# EAGLE board ARKnew (EAGLE 9.4.2)
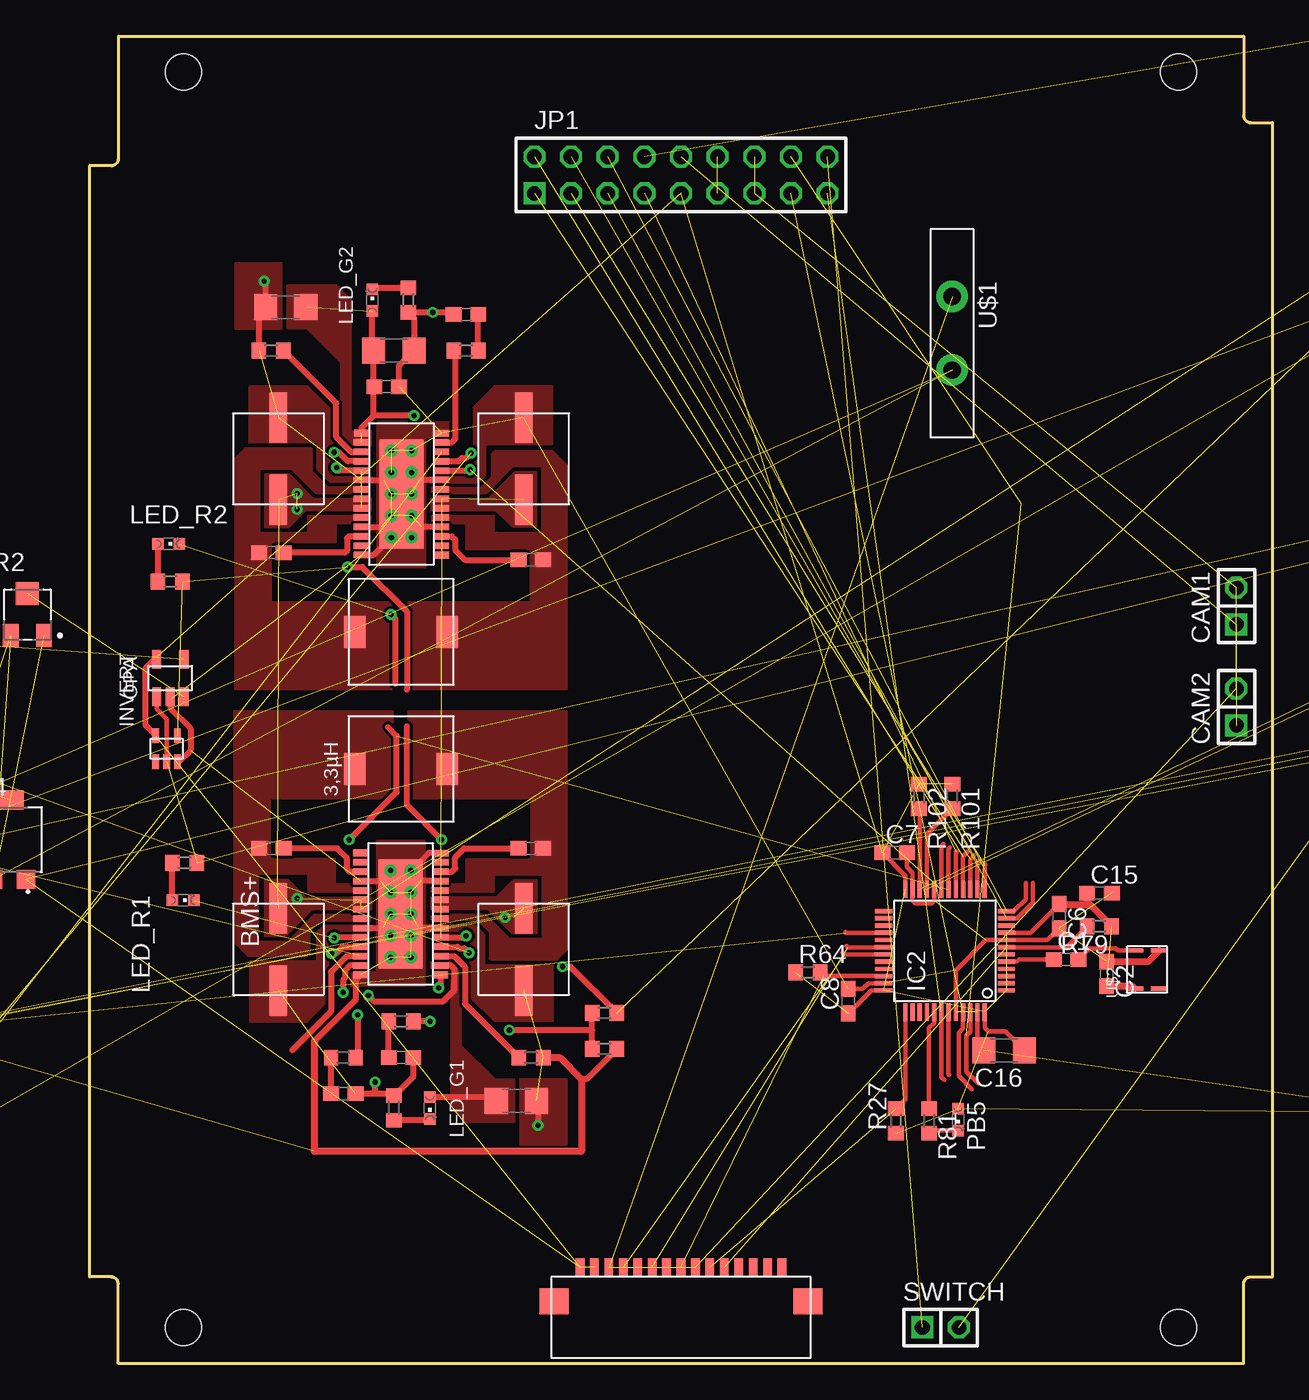
[diagram p0: board, top side]
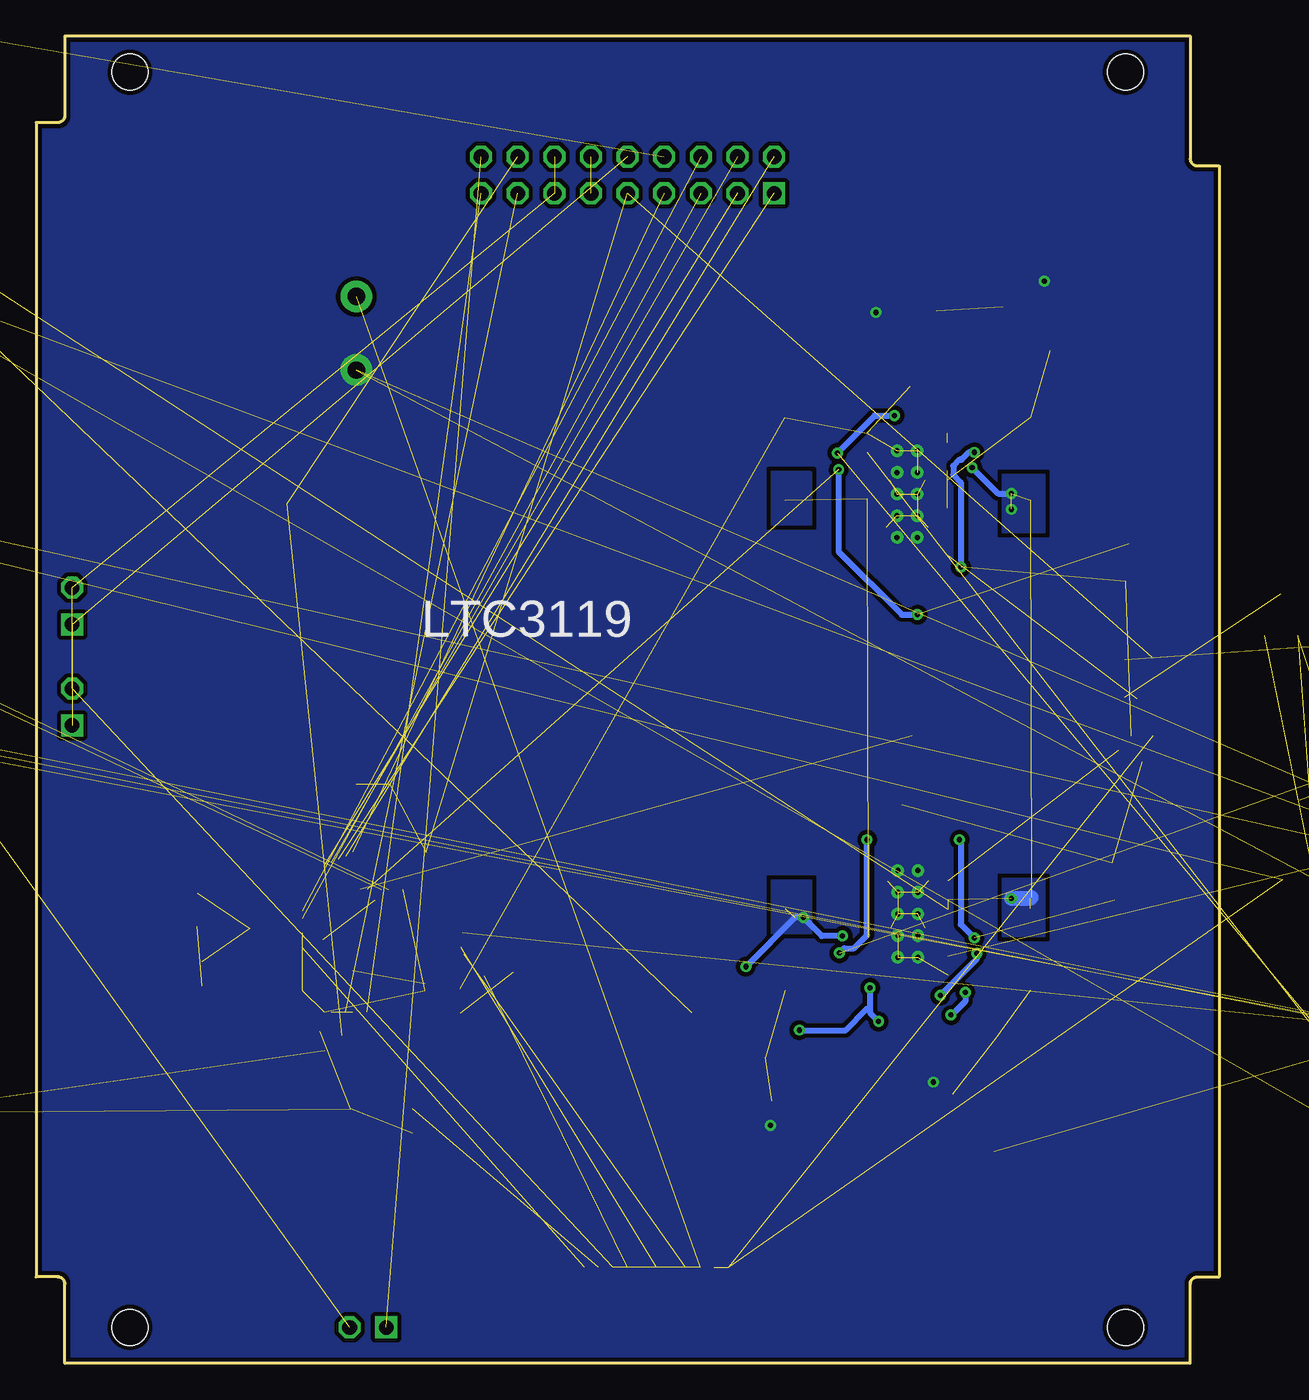
[diagram p1: board, bottom side, seen from below]

Size 82 x 92 mm. Coordinates in mm from the lower left corner, seen from the top.
Outline: 2,92 80,92 80,86.5 arc90 80.5,86 82,86 82,6 80.5,6 arc90 80,5.5 80,0 2,0 2,5.5 arc90 1.5,6 0,6 0,83 1.5,83 arc90 2,83.5 2,92
Copper layers (1*16): Top 0.035mm / dielectric 1.5mm / Bottom 0.035mm
Design rules "default *": minimum track width 0.25mm, minimum drill 0.35mm, track to track 0.2mm, track to pad 0.2mm, pad to pad 0.2mm, via to via 0.2mm, smd to smd 0.2mm, copper to edge 0.25mm, drill to drill 0.2mm, minimum pad ring 10mil, minimum via ring 8mil, stop-mask expansion 4mil, vias tented up to drill 0mil, thermal gap 10mil
Holes 2.5 mm at 6.5,2.5 75.5,2.5 75.5,89.5 6.5,89.5

## Footprints (pad centres in the part's own frame; a part is rotated, then mirrored left to right if it is on the bottom)
B82472G6 = smd 1.5 x 2.2: 1 -3.2,0; 2 3.2,0
MSOP10 = smd 0.3 x 1.275: 1 -1,-2.24; 2 -0.5,-2.24; 3 0,-2.24; 4 0.5,-2.24; 5 1,-2.24; 6 1,2.24; 7 0.5,2.24; 8 0,2.24; 9 -0.5,2.24; 10 -1,2.24
C0603 = smd 1.1 x 1: 1 -0.85,0; 2 0.85,0
C1206 = smd 1.6 x 1.8: 1 -1.4,0; 2 1.4,0
ECAP150-CMD = smd 1.2 x 3.5: P$1 0,2.85; P$2 0,-2.85
ECAP220-CMD = smd 1.2 x 3.5: P$1 0,2.85; P$2 0,-2.85
1X02 = drill 1.016 square: 1 -1.27,0 | drill 1.016 octagon: 2 1.27,0
LQFP48 = smd 0.3 x 1.2: 1 -2.75,-4.25; 2 -2.25,-4.25; 3 -1.75,-4.25; 4 -1.25,-4.25; 5 -0.75,-4.25; 6 -0.25,-4.25; 7 0.25,-4.25; 8 0.75,-4.25; 9 1.25,-4.25; 10 1.75,-4.25; 11 2.25,-4.25; 12 2.75,-4.25; 25 2.75,4.25; 26 2.25,4.25; 27 1.75,4.25; 28 1.25,4.25; 29 0.75,4.25; 30 0.25,4.25; 31 -0.25,4.25; 32 -0.75,4.25; 33 -1.25,4.25; 34 -1.75,4.25; 35 -2.25,4.25; 36 -2.75,4.25 | smd 1.2 x 0.3: 13 4.25,-2.75; 14 4.25,-2.25; 15 4.25,-1.75; 16 4.25,-1.25; 17 4.25,-0.75; 18 4.25,-0.25; 19 4.25,0.25; 20 4.25,0.75; 21 4.25,1.25; 22 4.25,1.75; 23 4.25,2.25; 24 4.25,2.75; 37 -4.25,2.75; 38 -4.25,2.25; 39 -4.25,1.75; 40 -4.25,1.25; 41 -4.25,0.75; 42 -4.25,0.25; 43 -4.25,-0.25; 44 -4.25,-0.75; 45 -4.25,-1.25; 46 -4.25,-1.75; 47 -4.25,-2.25; 48 -4.25,-2.75
SOT23-8 = smd 0.9 x 0.4: 1 -1.3,0.975; 2 -1.3,0.325; 3 -1.3,-0.325; 4 -1.3,-0.975; 5 1.3,-0.975; 6 1.3,-0.325; 7 1.3,0.325; 8 1.3,0.975
SC70 = smd 0.47 x 1: P$1 -0.75,-0.9; P$2 0,-0.9; P$3 0.75,-0.9; P$4 0.75,0.9; P$5 -0.75,0.9
2X09 = drill 1.016 square: 1 -10.16,-1.27 | drill 1.016 octagon: 2 -10.16,1.27; 3 -7.62,-1.27; 4 -7.62,1.27; 5 -5.08,-1.27; 6 -5.08,1.27; 7 -2.54,-1.27; 8 -2.54,1.27; 9 0,-1.27; 10 0,1.27; 11 2.54,-1.27; 12 2.54,1.27; 13 5.08,-1.27; 14 5.08,1.27; 15 7.62,-1.27; 16 7.62,1.27; 17 10.16,-1.27; 18 10.16,1.27
CHIPLED_0603 = smd 0.8 x 0.8: A 0,-0.75; C 0,0.75
SOT23-5 = smd 0.635 x 1.27: P$1 -0.95,-1.3; P$2 0,-1.3; P$3 0.95,-1.3; P$4 0.95,1.3; P$5 -0.95,1.3
R0603 = smd 1 x 1.1: 1 -0.85,0; 2 0.85,0
TRIM_3313J-1-205E = smd 1.1 x 1.6: 1 1.15,-1.45; 3 -1.15,-1.45 | smd 1.6 x 1.6: 2 0,1.45
TRIM_3314G-1-504E = smd 1.3 x 1.3: 1 1.15,-2.75; 3 -1.15,-2.75 | smd 2 x 1.3: 2 0,2.75
R2512 = smd 1.8 x 3.2: 1 -2.8,0; 2 2.8,0
MF-R400 = drill 1.2 pad 2.184: P$1 0,2.55; P$2 0,-2.55
Q24 = smd 0.3 x 1.2: P$1 -1.325,-0.85; P$2 1.325,-0.85; P$3 1.325,0.85; P$4 -1.325,0.85
68611 = smd 0.6 x 1.3: P$1 -7,0.65; P$2 -6,0.65; P$3 -5,0.65; P$4 -4,0.65; P$5 -3,0.65; P$6 -2,0.65; P$7 -1,0.65; P$8 0,0.65; P$9 1,0.65; P$10 2,0.65; P$11 3,0.65; P$12 4,0.65; P$13 5,0.65; P$14 6,0.65; P$15 7,0.65 | smd 2 x 1.8: P$16 8.8,-1.7; P$17 -8.8,-1.7
LTC3119+VIA = smd 0.45 x 1.05: 1 -4.225,-2.775; 2 -3.575,-2.775; 3 -2.925,-2.775; 4 -2.275,-2.775; 5 -1.625,-2.775; 6 -0.975,-2.775; 7 -0.325,-2.775; 8 0.325,-2.775; 9 0.975,-2.775; 10 1.625,-2.775; 11 2.275,-2.775; 12 2.925,-2.775; 13 3.575,-2.775; 14 4.225,-2.775; 15 4.225,2.775; 16 3.575,2.775; 17 2.925,2.775; 18 2.275,2.775; 19 1.625,2.775; 20 0.975,2.775; 21 0.325,2.775; 22 -0.325,2.775; 23 -0.975,2.775; 24 -1.625,2.775; 25 -2.275,2.775; 26 -2.925,2.775; 27 -3.575,2.775; 28 -4.225,2.775 | smd 7.56 x 3.05: 29 0,0 | drill 0.35 pad 0.813: P$1 -3,0.7; P$2 -1.5,0.7; P$3 0,0.7; P$4 1.5,0.7; P$5 3,0.7; P$6 3,-0.7; P$7 1.5,-0.7; P$8 0,-0.7; P$9 -1.5,-0.7; P$10 -3,-0.7

## Placement (x,y rotation side)
3,3µH  3,3µ  [B82472G6]  21.6,41.2 0 top
3,3µH1  3,3µH  [B82472G6]  21.6,50.7 180 top
AD5272#2  AD5272  [MSOP10]  -9.3,21.31 0 top  (outside the outline)
C1  1nF  [C0603]  67.7,28 0 top
C2  10nF  [C0603]  70.5,27 270 top
C5  100nF  [C0603]  90.9,17.4 0 top  (outside the outline)
C6  100nF  [C0603]  67.2,31 270 top
C7  100nF  [C0603]  55.8,35.4 0 top
C8  100nF  [C0603]  52.6,25.1 90 top
C9  0,1µ  [C0603]  115.8,92.3 0 top  (outside the outline)
C10  0,1µ  [C0603]  120.8,92.3 0 top  (outside the outline)
C15  100nF  [C0603]  70,32.6 0 top
C16  10µ  [C1206]  63.4,21.7 180 top
C29  1µ  [C0603]  -15.3,18.4 0 top  (outside the outline)
C40  0,1µ  [C0603]  30.6,35.7 180 top
C41  0,1µ  [C0603]  12.6,35.7 0 top
C44  680p  [C0603]  17.6,18.7 0 top
C45  4.7µ  [C1206]  29.6,18.2 0 top
C46  3,3n  [C0603]  21.6,21.2 0 top
C47  150µ  [ECAP150-CMD]  13.1,28.7 0 top
C48  220µ  [ECAP220-CMD]  30.1,28.7 0 top
C49  0,1µ  [C0603]  12.6,56.2 0 top
C50  0,1µ  [C0603]  30.6,55.7 180 top
C52  680p  [C0603]  26.1,72.7 180 top
C53  4.7µ  [C1206]  13.6,73.2 180 top
C54  150µ  [ECAP150-CMD]  30.1,62.7 180 top
C55  220µ  [ECAP220-CMD]  13.1,62.7 180 top
C56  0,1µ  [C0603]  20.6,67.7 0 top
C57  10µ  [C1206]  21.1,70.2 0 top
CAM1  [1X02]  79.5,52.5 90 top
CAM2  [1X02]  79.5,45.5 90 top
IC2  STM32F103C8T  [LQFP48]  59.3,28.6 90 top
INA219#1  INA219AID  [SOT23-8]  122.2,50.12 0 top  (outside the outline)
INVERT  INVERTER.  [SC70]  5.35,42.6 0 top
JP1  [2X09]  41,82.37 0 top
LED_G1  [CHIPLED_0603]  23.6,17.7 180 top
LED_G2  [CHIPLED_0603]  19.6,73.7 0 top
LED_R1  [CHIPLED_0603]  6.5,32.1 270 top
LED_R2  [CHIPLED_0603]  5.5,56.8 270 top
OPA  OPA333  [SOT23-5]  5.6,47.5 0 top
PB5  [CHIPLED_0603]  60.2,16.9 180 top
PWR  [CHIPLED_0603]  87.9,16.4 0 top  (outside the outline)
R1  91K  [R0603]  -9.5,15.4 0 top  (outside the outline)
R2  3313J-1-205E  [TRIM_3313J-1-205E]  -4.3,51.9 0 top  (outside the outline)
R3  14K3  [R0603]  -15.3,23.4 0 top  (outside the outline)
R4  3314G-1-504E  [TRIM_3314G-1-504E]  -5.55,36.3 0 top  (outside the outline)
R5  3314G-1-504E  [TRIM_3314G-1-504E]  -21.4,48 0 top  (outside the outline)
R6  3314G-1-504E  [TRIM_3314G-1-504E]  -22.5,35.5 0 top  (outside the outline)
R27  10k  [R0603]  55.9,16.8 90 top
R28  150k  [R0603]  12.6,70.2 0 top
R30  150k  [R0603]  26.1,70.2 0 top
R32  2k  [R0603]  6.6,34.7 180 top
R33  2k  [R0603]  22.1,73.7 90 top
R57  2k  [R0603]  5.6,54.2 180 top
R64  10k  [R0603]  49.8,27.1 0 top
R65  1M  [R0603]  35.7,24.3 0 top
R66  10k  [R0603]  21.6,23.7 0 top
R67  150k  [R0603]  35.7,21.8 180 top
R68  150k  [R0603]  30.6,21.2 180 top
R69  150k  [R0603]  17.6,21.2 180 top
R71  R01  [R2512]  117.8,99.3 0 top  (outside the outline)
R73  10R  [R0603]  125.8,92.3 0 top  (outside the outline)
R74  10R  [R0603]  115.8,87.3 0 top  (outside the outline)
R75  R01  [R2512]  125.8,99.3 0 top  (outside the outline)
R76  10R  [R0603]  120.8,87.3 0 top  (outside the outline)
R77  10R  [R0603]  125.8,87.3 0 top  (outside the outline)
R79  10k  [R0603]  70,30.3 180 top
R81  2k  [R0603]  58.2,16.8 270 top
R82  2k  [R0603]  91.9,6.7 0 top  (outside the outline)
R100  2k  [R0603]  21.1,17.7 270 top
R101  5k1  [R0603]  59.8,39.3 270 top
R102  5k1  [R0603]  57.5,39.3 270 top
SWITCH  [1X02]  59,2.5 0 top
U$1  MF-R400  [MF-R400]  59.8,71.4 180 top
U$2  Q24  [Q24]  73.3,27.3 90 top
U$12  FFC-CONNECT68611  [68611]  41,6 0 top
U$23  LTC31191  [LTC3119+VIA]  21.62,60.26 90 top
U$57  INA219AID  [SOT23-8]  122.2,64.78 0 top  (outside the outline)
U$59  LTC31191  [LTC3119+VIA]  21.57,31.16 270 top

## Library data of the parts
3,3µH 3,3µH1 AD5272#2 C47 C48 C54 C55 IC2 INA219#1 INVERT OPA R4-R6 U$1 U$2 U$12 U$23 U$57 U$59 = CanCubeSat
C1 C2 C5-C10 C15 C16 C29 C40 C41 C44-C46 C49 C50 C52 C53 C56 C57 = rcl; SPICEPREFIX: C
CAM1 CAM2 JP1 SWITCH = pinheadCS
LED_G1 LED_G2 LED_R1 LED_R2 PB5 PWR = led
R1 R3 R27 R28 R30 R32 R33 R57 R64-R69 R73 R74 R76 R77 R79 R81 R82 R100-R102 = resistor
R2 = CanCubeSat; AVAILABILITY: Good; DESCRIPTION: 100 kOhms 0.125W, 1/8W J Lead Surface Mount Trimmer Potentiometer Cermet 1 Turn Top Adjustment; MF: Bourns; MP: 3313J-1-104E; PACKAGE: 5025 Bourns; PRICE: None; PURCHASE-URL: https://pricing.snapeda.com/search/part/3313J-1-104E/?ref=eda
R71 R75 = rcl; SPICEPREFIX: R

## Nets
1.65: R4.2 R5.3
1W: IC2.17 JP1.7
3V3: C2.2 C5.1 C6.1 C7.1 C8.1 C15.1 C16.1 IC2.1 IC2.9 IC2.24 IC2.36 IC2.48 INA219#1.4 INVERT.P$5 JP1.9 OPA.P$5 PB5.A PWR.A R4.1 R27.1 R64.1 R79.1 R101.1 R102.1 U$2.P$4 U$12.P$1 U$12.P$2 U$57.4 U$57.7
5V: CAM1.1 CAM2.1 JP1.10
90: R65.1 R66.2 R67.2 U$59.15
302: OPA.P$4 R5.2
A: INVERT.P$2 OPA.P$1 R5.1 R32.1 U$59.18
AB-GND: JP1.11 JP1.12
BMS1: IC2.15 JP1.1
BMS2: IC2.16 JP1.2
BMS3: IC2.13 JP1.3
BMS4: IC2.14 JP1.4
BMS5: IC2.11 JP1.5
BMS6: IC2.12 JP1.6
BMS+: JP1.8 R75.2 R76.1
BUS+: R71.2 R73.1 SWITCH.2
BUSPLUS: JP1.18 SWITCH.1
DPD_RST: AD5272#2.7 IC2.28
GND: AD5272#2.6 AD5272#2.10 C2.1 C5.2 C6.2 C7.2 C8.2 C15.2 C16.2 C44.2 C45.2 C46.2 C47.P$2 C48.P$2 C52.2 C53.2 C54.P$2 C55.P$2 C56.2 C57.2 IC2.8 IC2.20 IC2.23 IC2.35 IC2.44 IC2.47 INA219#1.3 INA219#1.7 INA219#1.8 INVERT.P$3 OPA.P$2 R2.3 R3.2 R4.3 R6.3 R28.1 R33.1 R67.1 R68.1 R82.1 R100.1 U$1.P$1 U$2.P$2 U$23.4 U$23.9 U$23.14 U$23.20 U$23.25 U$23.28 U$23.29 U$23.P$1 U$23.P$2 U$23.P$3 U$23.P$4 U$23.P$5 U$23.P$6 U$23.P$7 U$23.P$8 U$23.P$9 U$23.P$10 U$57.3 U$57.8 U$59.4 U$59.9 U$59.14 U$59.20 U$59.25 U$59.28 U$59.29 U$59.P$1 U$59.P$2 U$59.P$3 U$59.P$4 U$59.P$5 U$59.P$6 U$59.P$7 U$59.P$8 U$59.P$9 U$59.P$10
GND-OUT: CAM1.2 CAM2.2 JP1.13 JP1.14 U$1.P$2 U$12.P$3 U$12.P$5 U$12.P$7 U$12.P$9
I2CINT: IC2.43
INA_BMS+: C47.P$1 C55.P$1 R6.1 R75.1 R77.1 U$23.19 U$23.22 U$23.23 U$59.6 U$59.7
INA_BUS+: C48.P$1 C54.P$1 R1.1 R2.1 R65.2 R71.1 R74.1 U$23.6 U$23.7 U$59.19 U$59.22 U$59.23
N$1: C1.1 IC2.5
N$3: AD5272#2.2 R1.2 U$23.12
N$4: C1.2 U$2.P$3
N$14: C9.2 INA219#1.2 R74.2
N$17: PB5.C R81.2
N$48: AD5272#2.3 AD5272#2.4 C29.2 R3.1
N$51: AD5272#2.5 C29.1
N$77: 3,3µH1.2 C49.1 U$23.21 U$23.24
N$78: 3,3µH1.1 C50.1 U$23.5 U$23.8
N$79: R28.2 U$23.17
N$80: C49.2 U$23.26
N$81: R30.1 U$23.13
N$82: C52.1 R30.2
N$84: C50.2 U$23.3
N$85: LED_R1.A R32.2
N$87: LED_R2.A R57.2
N$89: R6.2 U$59.12
N$91: LED_G1.C R100.2
N$92: LED_G2.C R33.2
N$129: C41.2 U$59.3
N$131: 3,3µH.2 C40.1 U$59.21 U$59.24
N$132: 3,3µH.1 C41.1 U$59.5 U$59.8
N$135: R69.1 U$59.13
N$136: C44.1 R69.2
N$139: C46.1 R66.1
N$142: R68.2 U$59.17
N$144: C40.2 U$59.26
N$147: C9.1 INA219#1.1 R73.2
N$150: C10.1 R76.2 U$57.1
N$151: C10.2 R77.2 U$57.2
N$159: PWR.C R82.2
N$161: IC2.41 R81.1
N$215: AD5272#2.1 C53.1 C56.1 C57.1 LED_G2.A U$23.11 U$23.15 U$23.16
N$234: C45.1 LED_G1.A U$59.11 U$59.16
NRST: IC2.7 R79.2 U$12.P$11
PGOOD1: IC2.18 LED_R1.C U$59.10
PGOOD2: IC2.19 LED_R2.C U$23.10
RUN: OPA.P$3 R2.2
RX-S: IC2.31 U$12.P$4
SCL: AD5272#2.9 IC2.21 INA219#1.5 R101.2 U$57.5
SCLTM: IC2.45 JP1.15
SDA: AD5272#2.8 IC2.22 INA219#1.6 R102.2 U$57.6
SDATM: IC2.46 JP1.16
SWC: IC2.37 R27.2 U$12.P$10
SWD: IC2.34 R64.2 U$12.P$8
TIME: IC2.42 JP1.17
TX-S: IC2.30 U$12.P$6
Y: INVERT.P$4 R57.1 U$23.18

## Tracks (layer width: path | path; a pad name or v marks a point on that pad's centre or on a via)
1.65  (1 unrouted)
1W  (1 unrouted)
  Top 0.3: IC2.17 60.05,35.44 60.11,35.49
3V3  (20 unrouted)
  Top 0.3: IC2.48 62.05,23.25 62.3,23 63.5,23 C16.1 | IC2.36 54.2,25.85 C8.1 | IC2.24 56.55,33.8 C7.1 | IC2.9 65.2,29.85 67.17,31.82 C6.1
  Top 0.4: OPA.P$5 4.65,48.95 3.9,48.2 3.9,44.2 INVERT.P$5
  Top 0.5: C2.2 72.28,26.15 U$2.P$4 | R79.1 69.38,31.77 | 69.38,31.77 69.15,32 C15.1 | 69.38,31.77 67.22,31.77 67.17,31.82
5V  (2 unrouted)
90  (via drill 0.35, 0.35 pad 0.7)
  Top 0.4: U$59.15 24.35,26.18 v24.2,26.03 | v23.6,23.7 R66.2 | R67.2 34.85,23.1 | 34.85,23.1 R65.1 | 34.85,23.1 v29.1,23.1
  Bottom 0.4: v24.2,26.03 24.2,24.4 | 24.2,24.4 24.2,24.3 v23.6,23.7 | 24.2,24.4 24.4,24.6 25.89,23.1 v29.1,23.1
302  (1 unrouted)
A  (via drill 0.35)  (3 unrouted)
  Top 0.3: INVERT.P$2 5.35,44.65 4.65,45.35 OPA.P$1
  Top 0.4: U$59.18 25.49,28.88 25.59,28.78 25.98,28.78 v26.32,28.45 | v24.4,36.3 22,38.7 22,44.15
  Bottom 0.4: v26.32,28.45 25.99,28.77 25.3,28.77 24.4,29.67 v24.4,36.3
AB-GND  (1 unrouted)
BMS1  (1 unrouted)
  Top 0.3: IC2.15 61.05,34.94 61.3,35.2
BMS2  (1 unrouted)
  Top 0.3: IC2.16 60.55,35.15 60.9,35.5
BMS3  (1 unrouted)
  Top 0.3: IC2.13 62.05,34.53 62.11,34.59
BMS4  (1 unrouted)
  Top 0.3: IC2.14 61.55,34.74 61.71,34.89
BMS5  (1 unrouted)
  Top 0.3: IC2.11 64.3,30.85 65.4,31.95 65.4,33.3
BMS6  (1 unrouted)
  Top 0.3: IC2.12 64.09,31.35 64.9,32.16 64.9,33.3
BMS+  (2 unrouted)
BUS+  (2 unrouted)
BUSPLUS  (1 unrouted)
DPD_RST  (1 unrouted)
  Top 0.3: IC2.28 52.45,29.85 52.4,29.9
GND  (via drill 0.35 pad 0.7)  (52 unrouted)
  Top 0.3: IC2.47 61.55,22.15 C16.2 | IC2.44 60.05,27.25 62.15,29.35 IC2.8 66.4,29.35 C6.2 | IC2.35 53.99,26.35 53.59,25.95 C8.2 | C7.2 56.65,34.41 57.05,34.01 IC2.23 57.05,32.1 57.26,31.9 58.34,31.9 58.55,32.1 IC2.20
  Top 0.4: U$59.14 18.44,26.58 18.44,25.21 15.6,22.37 | C45.2 31.1,18.1 v31.1,16.5 | C53.2 12.2,73.4 | 12.2,73.4 12.2,74.9 v12.1,75 | U$59.4 20.15,33.43 U$59.P$10 | U$59.25 23,33.43 U$59.P$1 23.5,35.38 U$59.28 | U$23.25 20.2,57.98 U$23.P$1 19.7,56.03 U$23.28 | U$23.4 23.05,57.98 U$23.P$10 | C56.2 21.45,69.15 C57.2 22.5,72.45 R33.1 v23.8,72.85 25.1,72.85 C52.2 | U$23.9 22.85,61.23 U$23.P$7 | U$23.20 20.4,61.23 U$23.P$4 | 5.7,46.1 OPA.P$2 5.6,45.4 7,44 7,42.5 6.2,41.7 INVERT.P$3 | U$59.9 20.35,30.18 U$59.P$7 | U$59.20 22.8,30.18 U$59.P$4 | 19.6,18.7 20.95,18.7 R100.1 22.45,19.9 C46.2 | 19.6,18.7 19.8,18.9 v19.8,19.5 | R67.1 34.45,19.7 34.1,19.7 | R28.1 11.75,72.95 12.2,73.4 | 19.6,18.7 C44.2
  Top 0.5: R68.1 32.6,21.2 34.1,19.7 34.1,14.7 15.6,14.7 15.6,22.37 | C2.1 73.38,27.85 U$2.P$2
  pour Top (no thermals): 23.61,30.4 26.69,30.4 27.34,29.75 27.34,27.61 32.1,27.61 32.1,23.7 28.1,23.7 26.31,25.49 26.31,29.49 25.82,29.98 23.61,29.98
  pour Top (no thermals): 29.84,19.7 29.84,15.2 33.1,15.2 33.1,19.7
  pour Top (no thermals): 19.6,30.33 16.23,30.33 15.73,29.83 15.73,27.85 11.1,27.85 11.1,23.7 15.1,23.7 16.59,25.19 16.59,29.37 17.24,30.02 19.6,30.02
  pour Top (no thermals): 19.91,27.1 18.1,27.1 18.1,26.2 23.26,26.2 23.26,36.2 19.91,36.2
  pour Top (no thermals): 19.58,61.08 16.69,61.08 15.82,61.95 15.82,63.82 11.09,63.82 11.09,67.73 15.09,67.73 16.88,65.94 16.88,61.94 17.37,61.45 19.58,61.45
  pour Top (no thermals): 13.33,71.73 13.33,76.23 10.09,76.23 10.09,71.73
  pour Top (no thermals): 23.59,61.06 26.96,61.06 27.46,61.56 27.46,63.73 32.09,63.73 32.09,67.73 28.09,67.73 26.62,66.26 26.62,62.08 25.95,61.41 23.59,61.41
  pour Top (no thermals): 23.29,64.2 25.1,64.2 25.1,65.2 19.94,65.2 19.94,55.2 23.29,55.2
  pour Bottom (isolate 0.3, rank 2, no thermals): 82,92 0,92 0,0.1 82,0.1
GND-OUT  (8 unrouted)
I2CINT
  Top 0.3: IC2.43 59.55,20.05 59.6,20
INA_BMS+  (via drill 0.35 pad 0.7)  (11 unrouted)
  Top 0.4: U$23.19 17.33,61.88 v17.12,62.09
  Bottom 0.4: v17.12,62.09 15.33,60.3 v14.4,60.3
  Bottom 1: v14.39,32.22 13.1,32.22 13.02,32.3
  other vias: 14.4,59.2
  pour Top (no thermals): 19.52,32.31 19.52,31.47 15.43,31.47 13.57,29.61 12.17,29.61 12.17,33.56 13.74,33.56 14.99,32.31
  pour Top (no thermals): 19.49,59.1 14.96,59.1 13.79,57.93 12.19,57.93 12.19,61.63 13.83,61.63 15.51,59.95 19.49,59.95
  pour Bottom (no thermals): 12.1,29.6 15,29.6 15,33.6 12.1,33.6
  pour Bottom (no thermals): 12.1,57.6 15,57.6 15,61.6 12.1,61.6
INA_BUS+  (via drill 0.35, 0.35 pad 0.7)  (10 unrouted)
  Top 0.4: v32.8,27.5 33.35,27.5 R65.2 | U$59.19 26,29.53 v26.1,29.63
  Bottom 0.4: v32.8,27.5 29.4,30.9 v28.8,30.9 27.53,29.63 v26.1,29.63
  pour Top (no thermals): 23.7,32.32 28.22,32.32 29.4,33.5 31,33.5 31,29.8 29.3,29.8 27.62,31.48 23.7,31.48
  pour Top (no thermals): 23.7,59.12 23.7,59.95 27.67,59.95 29.52,61.8 30.96,61.8 30.96,57.97 29.35,57.97 28.2,59.12
  pour Bottom (no thermals): 31,29.8 31,33.5 28.3,33.5 28.3,29.8
  pour Bottom (no thermals): 31,58.1 31,61.8 28.3,61.8 28.3,58.1
N$1
  Top 0.3: IC2.5 64.3,27.85 64.44,28 C1.1
N$3  (2 unrouted)
N$4
  Top 0.3: U$2.P$3 71.27,28.62 71.14,28.75 69.3,28.75 C1.2
N$14  (2 unrouted)
N$17
  Top 0.3: R81.2 58.4,16.15 PB5.C
N$48  (3 unrouted)
N$51  (1 unrouted)
N$77
  pour Top (no thermals): 15.66,60.33 19.39,60.33 19.39,60.69 16.55,60.69 15.43,61.81 15.43,63.39 15.4,63.42 10.78,63.42 10.09,62.73 10.09,46.73 21.09,46.73 21.09,52.73 12.59,52.73 12.59,56.93 17.09,56.93 17.09,58.23 19.49,58.23 19.49,58.72 15.13,58.72 15.13,57.55 11.81,57.55 11.81,62.02 13.97,62.02
N$78
  pour Top (no thermals): 22.09,52.73 22.09,46.73 33.09,46.73 33.09,62.23 32.09,63.23 28.09,63.23 27.86,63 27.86,61.43 27.11,60.68 23.71,60.68 23.71,60.33 27.51,60.33 29.37,62.19 31.38,62.19 31.38,57.55 28.05,57.55 28.05,58.73 23.71,58.73 23.71,58.23 26.09,58.23 26.09,56.46 30.59,56.46 30.59,52.73
N$79
  Top 0.4: U$23.17 18.13,63.18 17.1,64.21 17.1,66.55 R28.2
N$80
  Top 0.4: C49.2 17.72,56.2 17.84,56.32 17.84,57.18 17.99,57.33 U$23.26
N$81
  Top 0.4: U$23.13 25.1,63.83 25.35,64.08 25.35,70.1 R30.1
N$82
  Top 0.4: R30.2 C52.1
N$84
  Top 0.4: C50.2 26.03,55.7 25.35,56.38 25.35,57.09 25.11,57.33 U$23.3
N$85
  Top 0.4: LED_R1.A R32.2
N$87
  Top 0.4: R57.2 LED_R2.A
N$89  (1 unrouted)
  Top 0.4: U$59.12 17.84,28.23 16.74,27.13 16.74,24.39 14.05,21.7
N$91
  Top 0.4: LED_G1.C 23.5,16.85 R100.2
N$92
  Top 0.4: LED_G2.C 19.7,74.55 R33.2
N$129
  Top 0.4: C41.2 17.18,35.7 17.84,35.04 17.84,34.28 18.04,34.08 U$59.3
N$131
  pour Top (no thermals): 27.45,31.1 23.7,31.1 23.7,30.78 26.87,30.78 27.73,29.92 27.73,28.07 27.79,28.01 32.41,28.01 33.1,28.7 33.1,45.2 22.1,45.2 22.1,39.2 30.6,39.2 30.6,34.92 26.1,34.92 26.1,33.2 23.7,33.2 23.7,32.71 28.04,32.71 28.04,33.89 31.39,33.89 31.39,29.42 29.13,29.42
N$132
  pour Top (no thermals): 21.03,39.2 21.03,45.2 10.03,45.2 10.03,29.2 11,28.23 15.06,28.23 15.27,28.44 15.27,29.97 16.01,30.71 19.48,30.71 19.48,31.07 15.58,31.07 13.73,29.22 11.7,29.22 11.7,33.95 15.17,33.95 15.17,32.7 19.53,32.7 19.53,33.2 17.03,33.2 17.03,34.97 12.53,34.97 12.53,39.2
N$135  (via drill 0.35)
  Top 0.4: U$59.13 18.08,27.58 17.71,27.21 17.71,26.72 17.59,26.6 v17.59,25.72 | v18.59,24.15 18.59,21.34 R69.1
  Bottom 0.4: v17.59,25.72 17.59,25.08 18.52,24.15 v18.59,24.15
N$136
  Top 0.4: C44.1 R69.2
N$139
  Top 0.4: C46.1 R66.1
N$142
  Top 0.4: U$59.17 25.29,28.23 26.02,27.5 26.02,24.93 R68.2
N$144
  Top 0.4: C40.2 25.97,35.7 25.35,35.08 25.35,34.32 25.11,34.08 U$59.26
N$147  (2 unrouted)
N$150  (2 unrouted)
N$151  (2 unrouted)
N$159  (1 unrouted)
N$161
  Top 0.3: IC2.41 58.55,23.61 58.2,23.25 R81.1
N$215  (via drill 0.35 pad 0.7)  (3 unrouted)
  Top 0.4: U$23.11 25.6,62.53 25.82,62.75 26.11,62.75 v26.46,63.1 | v22.5,65.7 19.7,65.7 | 19.7,65.7 19.7,67.65 C56.1 19.7,67.75 C57.1 19.6,70.3 LED_G2.A | 19.7,65.7 18.85,64.85 U$23.15
  Bottom 0.4: v26.46,63.1 23.86,65.7 v22.5,65.7
  pour Top (no thermals): 19.49,63.48 17.45,63.48 17.45,69.37 15.09,71.73 13.75,71.73 13.75,74.73 17.09,74.73 18.09,73.73 18.09,64.62 19.49,64.62
N$234  (via drill 0.35 pad 0.7)
  Top 0.4: U$59.11 17.9,28.88 17.88,28.86 17.55,28.86 17.11,28.42 v16.8,28.42 | v19.33,25.5 19.73,25.1 24.5,25.1 25.3,25.9 25.3,27.34 25.06,27.58 U$59.16 | C45.1 27.95,18.45 LED_G1.A
  Bottom 0.4: v16.8,28.42 16.8,28.03 v19.33,25.5
  pour Top (no thermals): 23.7,27.95 25.74,27.95 25.74,22.06 28.1,19.7 29.44,19.7 29.44,16.7 26.1,16.7 25.1,17.7 25.1,27.31 23.7,27.31
NRST  (1 unrouted)
  Top 0.3: IC2.7 67.7,28.85 R79.2
PGOOD1  (via drill 0.35)  (2 unrouted)
  Top 0.3: IC2.18 59.55,35.64 59.65,35.75
  Top 0.4: U$59.10 17.02,29.53 v16.97,29.49 | v18,36.3 21.3,39.6 21.3,43.5 20.7,44.1
  Bottom 0.4: v16.97,29.49 17.9,30.41 17.9,36.2 v18,36.3
PGOOD2  (via drill 0.35, 0.35 pad 0.7)  (2 unrouted)
  Top 0.3: IC2.19 59.05,35.85 59.2,36
  Top 0.4: U$23.10 26.31,61.88 v26.37,61.94 | v20.9,51.9 21.2,51.6 21.2,47.1
  Bottom 0.4: v26.37,61.94 26.37,56.27 22,51.9 v20.9,51.9
RUN  (1 unrouted)
RX-S  (1 unrouted)
  Top 0.3: IC2.31 52.35,28.35 52.2,28.5
SCL  (3 unrouted)
  Top 0.3: IC2.21 58.05,36.7 R101.2
SCLTM  (1 unrouted)
  Top 0.3: IC2.45 60.55,23.22 60.24,22.91 60.24,19.91 61.18,18.98
SDA  (3 unrouted)
  Top 0.3: IC2.22 57.55,38.4 R102.2
SDATM  (2 unrouted)
  Top 0.3: IC2.46 61.05,22.98 60.8,22.73 60.8,20.2 61.6,19.4
SWC  (1 unrouted)
  Top 0.3: IC2.37 56.55,18.3 R27.2
SWD  (1 unrouted)
  Top 0.3: IC2.34 50.9,26.85 R64.2
TIME  (1 unrouted)
  Top 0.3: 59.25,19.65 59.05,19.84 IC2.42
TX-S  (1 unrouted)
  Top 0.3: IC2.30 52.56,28.85 52.45,28.95
Y  (via drill 0.35 pad 0.7)  (2 unrouted)
  Top 0.4: U$23.18 17.9,62.53 17.28,63.15 v16.96,63.15 | v17.9,55.2 18.9,55.2 22,52.1 22,46.7
  Bottom 0.4: v16.96,63.15 17.34,63.15 17.86,62.63 18,62.63 18.43,62.2 18.43,61.6 17.9,61.07 v17.9,55.2

## Text on the board
tNames: BMS+
bNames: LTC3119